# Altium PCB Shield.PcbDoc
Units mil, origin at the board's own origin, x right, y up, seen from the top; angles counter-clockwise.
Board outline 2100 x 2750 mil, 2 copper layers (Top Layer, Bottom Layer); 17 components, 30 nets, 92 pads, 8 vias.
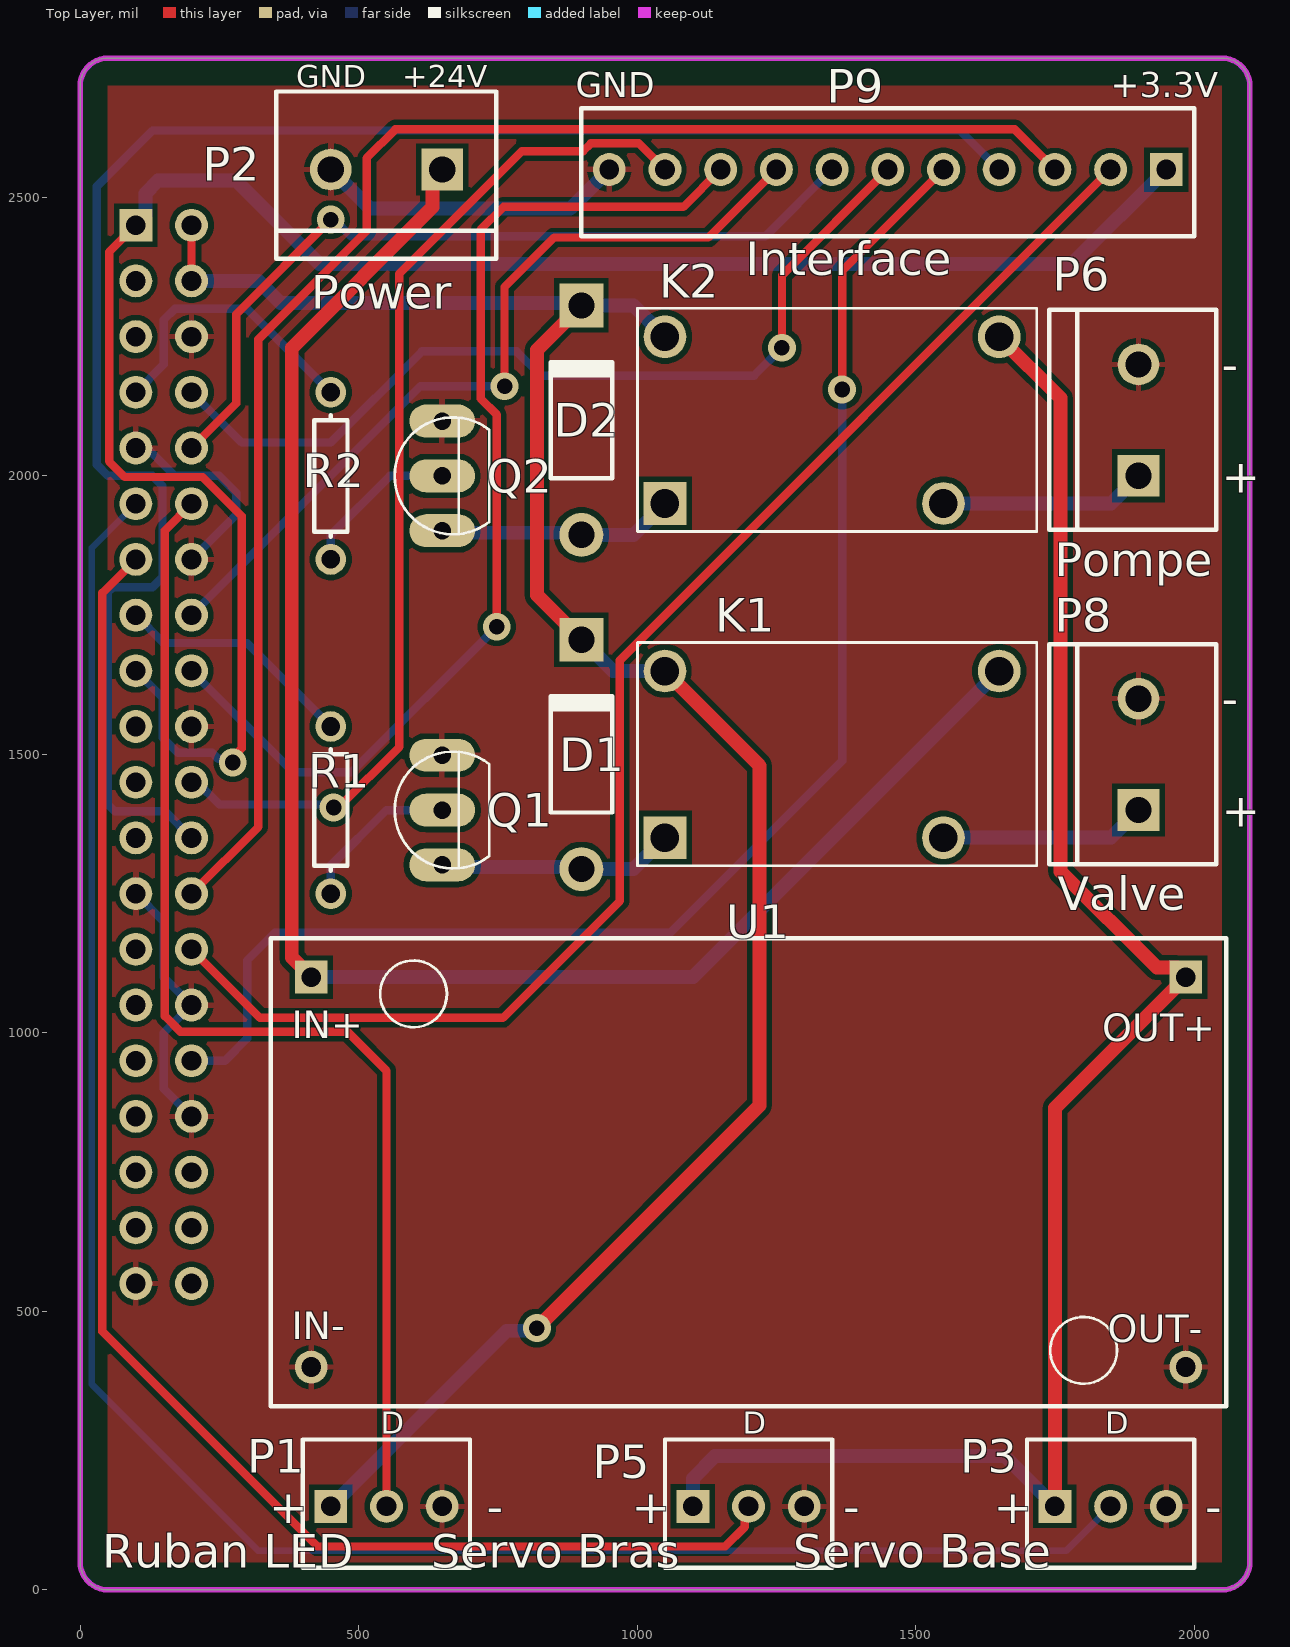
[diagram p0: Top Layer view]
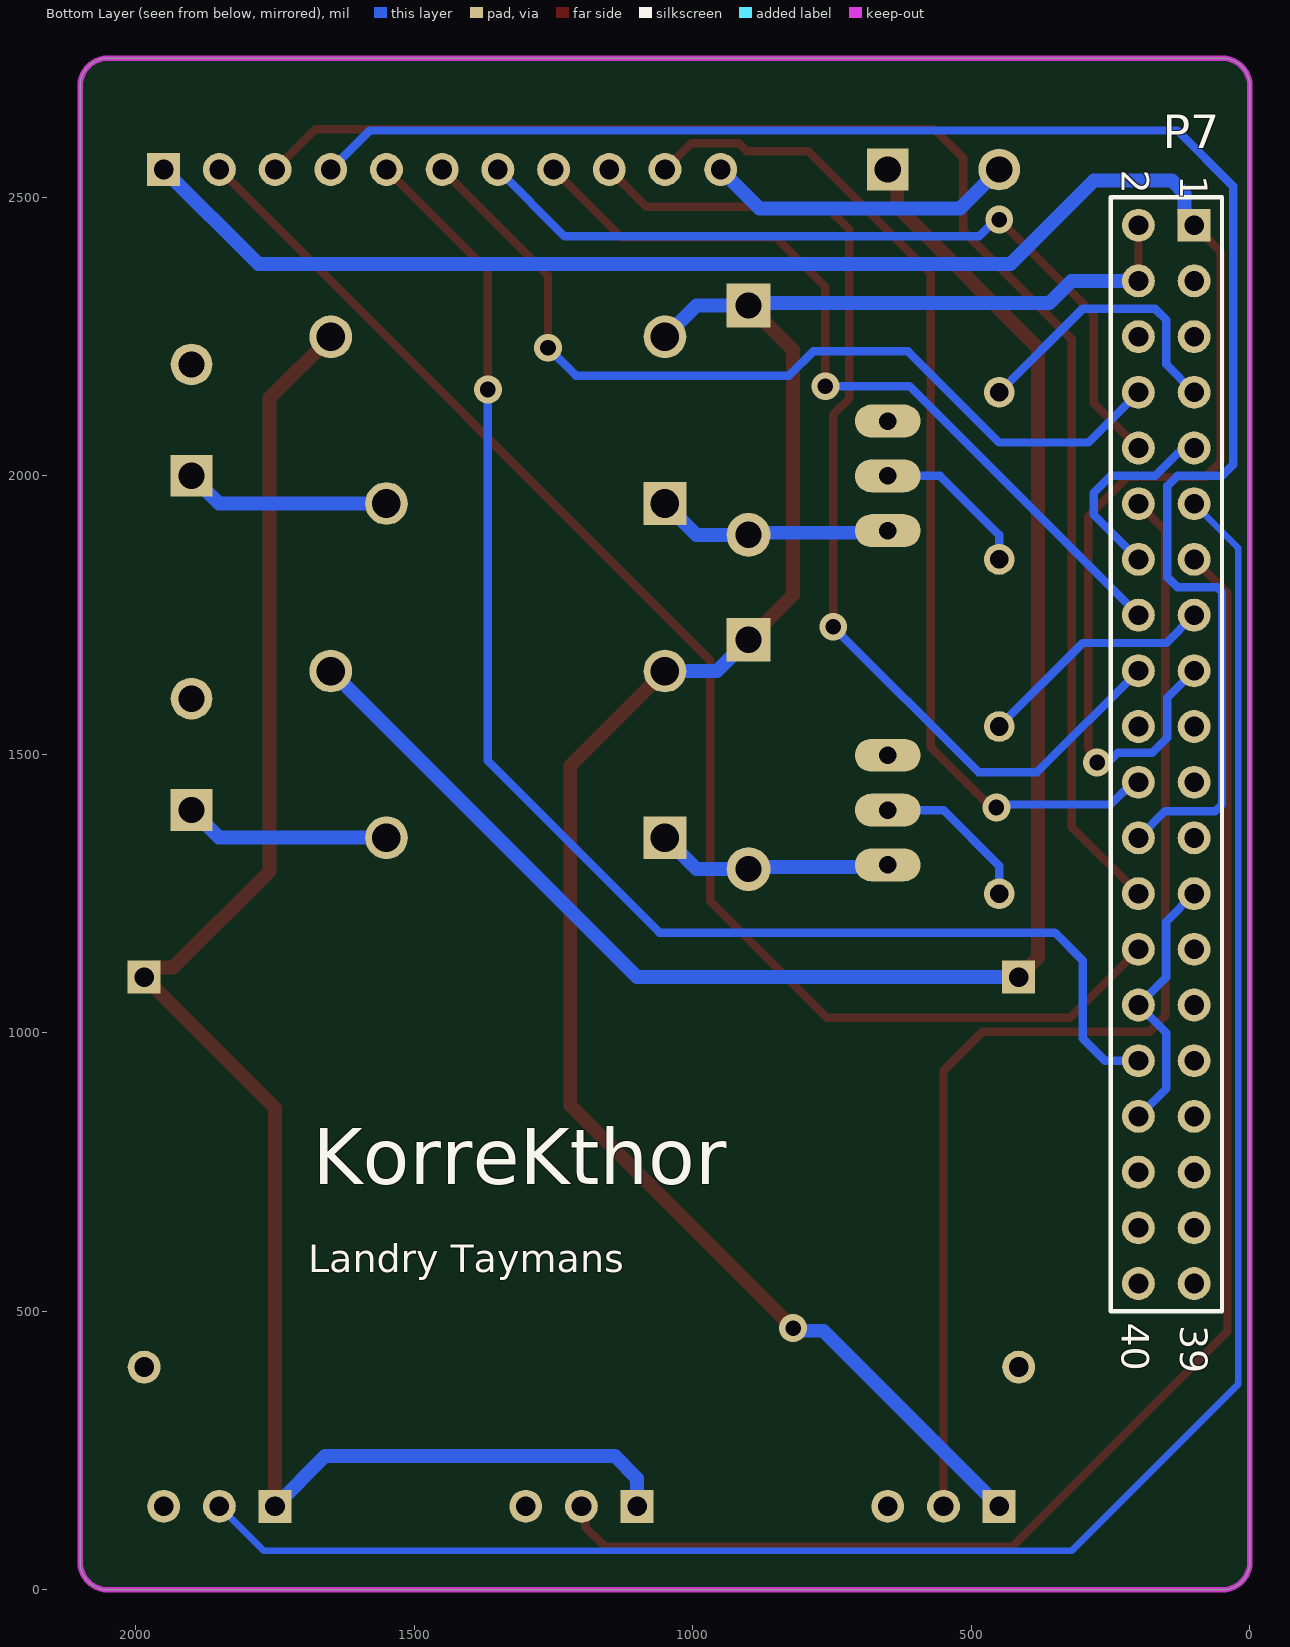
[diagram p1: Bottom Layer view, seen from below]

## Layer stack, top to bottom
Top Solder: solder mask 0.4, Solder Resist, Dk 3.5
Top Layer: signal copper 1.4
Dielectric 1: dielectric 12.6, FR-4, Dk 4.8
Bottom Layer: signal copper 1.4
Bottom Solder: solder mask 0.4, Solder Resist, Dk 3.5

## Board outline
0,50 ccw(c50,50) 50,0 2050,0 ccw(c2050,50) 2100,50 2100,2700 ccw(c2050,2700) 2050,2750 50,2750 ccw(c50,2700) 0,2700

## Design rules (kind name [scope] priority, off if disabled: settings)
Clearance [All] p1: gap=10 ignorepadtopadclearanceinfootprint=FALSE except(0: Arc-Hole Track-Hole SMDPad-Hole THPad-Hole Via-Hole Fill-Hole Poly-Hole Region-Hole Text-Hole)
PolygonConnect [All] p1: connectstyle=Relief reliefconductorwidth=10 reliefentries=4 polygonreliefangle="90 Angle" airgapwidth=10
RoutingVias [All] p1: holewidth=28 width=50 viastyle="Through Hole" minholewidth=28 minwidth=50 maxholewidth=28 maxwidth=50
SolderMaskExpansion [All] p1: expansion=4 istentingtop=FALSE
Width [All] p1: maxlimit=75 minlimit=10 preferedwidth=15
30 further rules are at their usual default settings.

## Components (designator, comment, footprint, x,y, rotation, side; value= is the part's Value field where it differs from the comment)
D1 "1N4004" DO-41 900,1500 r90 top
D2 "1N4004" DO-41 900,2100 r90 top
K1 "Relay-SPST" RELAY_OJE-SH_series 1350,1500 r0 top
K2 "Relay-SPST" RELAY_OJE-SH_series 1350,2100 r0 top
P1 "Ruban LED" Conn_1X3 450,150 r0 top
P2 "Power" Bornier_1X2 550,2550 r180 top
P3 "Servo Base" Conn_1X3 1750,150 r0 top
P5 "Servo Bras" Conn_1X3 1100,150 r0 top
P6 "Pompe" Bornier_1X2 1900,2100 r90 top
P7 "Rasberry Pi Connector" HDR2X20 200,2450 r270 bottom
P8 "Valve" Bornier_1X2 1900,1500 r90 top
P9 "Interface" Conn_1X11 1950,2550 r180 top
Q1 "2N2222" TO-92 650,1400 r90 top
Q2 "2N2222" TO-92 650,2000 r90 top
R1 "Res1" AXIAL-0.3 450,1400 r270 top value=3.9K
R2 "Res1" AXIAL-0.3 450,2000 r270 top value=3.9K
U1 "HW-411_Buck_converter" HW-411_Buck_converter 1200,750 r0 top

## Footprints (in the part's own frame and the unit in brackets; to place one, negate y for a bottom-side part, rotate by r counter-clockwise, add the part's x,y. Pads: shape width x height; smd on the part's side, far side on the other; paste and mask are expansions set on the pad)
AXIAL-0.3 [mm] "Axial Device, Thru-Hole; 2 Leads; 0.3 in Pin Spacing"
  round 1.4 hole 0.85: 1(-3.81,0) 2(3.81,0)
  silkscreen extent -2.77,-0.76 2.77,0.76
Bornier_1X2 [mm] "Connector; Header; 3 Position"
  rect 1.9x1.9 hole 1.2: 1(-2.54,0)
  round 1.9 hole 1.2: 2(2.54,0)
  silkscreen extent -5,-3.56 5.03,4.06
Conn_1X3 [mm] "Connector; Header; 3 Position"
  rect 1.5x1.5 hole 0.9: 1(0,0)
  round 1.5 hole 0.9: 2(2.54,0) 3(5.08,0)
  silkscreen extent -1.27,-2.79 6.35,3.05
Conn_1X11 [mm] "Connector; Header; 3 Position"
  rect 1.5x1.5 hole 0.9: 1(0,0)
  round 1.5 hole 0.9: 2(2.54,0) 3(5.08,0) 4(7.62,0) 5(10.16,0) 6(12.7,0) 7(15.24,0) 8(17.78,0) 9(20.32,0) 10(22.86,0) 11(25.4,0)
  silkscreen extent -1.27,-2.79 26.67,3.05
DO-41 [mm] "Diode, Axial; Body 5.2 x 2.7 mm (LxDia. max), Lead Dia. 0.86 mm (max)"
  round 2 hole 1.2: 1(-5.23,0)
  rect 2x2 hole 1.2: 2(5.23,0)
  silkscreen extent -2.65,-1.4 2.75,1.4
HDR2X20 [mm] "Connector; Header; 20x2 Position"
  rect 1.5x1.5 hole 0.9: 1(0,2.54)
  round 1.5 hole 0.9: 2(0,0) 3(2.54,2.54) 4(2.54,0) 5(5.08,2.54) 6(5.08,0) 7(7.62,2.54) 8(7.62,0) 9(10.16,2.54) 10(10.16,0) 11(12.7,2.54) 12(12.7,0) 13(15.24,2.54) 14(15.24,0) 15(17.78,2.54) 16(17.78,0) 17(20.32,2.54) 18(20.32,0) 19(22.86,2.54) 20(22.86,0) 21(25.4,2.54) 22(25.4,0) 23(27.94,2.54) 24(27.94,0) 25(30.48,2.54) 26(30.48,0) 27(33.02,2.54) 28(33.02,0) 29(35.56,2.54) 30(35.56,0) 31(38.1,2.54) 32(38.1,0) 33(40.64,2.54) 34(40.64,0) 35(43.18,2.54) 36(43.18,0) 37(45.72,2.54) 38(45.72,0) 39(48.26,2.54) 40(48.26,0)
  silkscreen extent -1.27,-1.27 49.53,3.81
HW-411_Buck_converter [mm] "HW-411 Buck converter Board"
  rect 1.5x1.5 hole 0.9: 1(-19.939,8.89) 3(19.939,8.89)
  round 1.5 hole 0.9: 2(-19.939,-8.89) 4(19.939,-8.89)
  silkscreen extent -21.78,-10.67 21.78,10.67
RELAY_OJE-SH_series [mm] "Relay_SPST"
  round 1.95 hole 1.3: 1(7.62,3.8) 2(5.08,-3.8) 3(-7.62,3.8)
  rect 1.95x1.95 hole 1.3: 4(-7.62,-3.8)
  silkscreen extent -8.87,-5.08 9.33,5.1
TO-92 [mm]
  oval 1.5x3 hole 0.8: 1(-2.5,0) 2(0,0) 3(2.5,0)
  silkscreen extent -2.67,-2.15 2.66,2.17

## Part data
D1 D2: library part "Diode 1N4004", "1 Amp General Purpose Rectifier", Code_JEDEC=DO-204-AL, ComponentLink1Description="Manufacturer Link", ComponentLink1URL=http://www.fairchildsemi.com/, ComponentLink2Description=Datasheet, ComponentLink2URL=http://www.fairchildsemi.com/ds/1N%2F1N4001.pdf, DatasheetVersion=1998, LatestRevisionDate=17-Jul-2002, LatestRevisionNote="Re-released for DXP Platform.", PackageDescription="Diode, Axial; Body 5.2 x 2.7 mm (LxDia. max), Lead Dia. 0.86 mm (max)", PackageReference=DO-41, PackageVersion=Aug-1999, Published=8-Jun-2000, Publisher="Altium Limited"
K1 K2: "Single-Pole Single-Throw Relay", LatestRevisionDate=17-Jul-2002, LatestRevisionNote="Re-released for DXP Platform.", PackageReference=MODULE4, Published=24-Mar-1999, Publisher="Altium Limited"
P1 P3 P5: library part "Header 3", "Header, 3-Pin", LatestRevisionDate=17-Jul-2002, LatestRevisionNote="Re-released for DXP Platform.", Publisher="Altium Limited"
P2 P6 P8: library part "Header 2", "Header, 2-Pin", LatestRevisionDate=17-Jul-2002, LatestRevisionNote="Re-released for DXP Platform.", Publisher="Altium Limited"
P7: library part MHDR2X20, "Header, 20-Pin, Dual row", LatestRevisionDate=17-Jul-2002, LatestRevisionNote="Re-released for DXP Platform.", Publisher="Altium Limited"
P9: library part "Header 11", "Header, 11-Pin", LatestRevisionDate=17-Jul-2002, LatestRevisionNote="Re-released for DXP Platform.", Publisher="Altium Limited"
Q1 Q2: library part NPN, "NPN Bipolar Transistor", Code_JEDEC=TO-226-AA, LatestRevisionDate=17-Jul-2002, LatestRevisionNote="Re-released for DXP Platform.", PackageDescription="TO, Flat Index; 3 In-Line, Axial Leads; Body Dia. 4.8mm; Leads 0.55 x 0.51 mm (max)", PackageReference=TO-226-AA, Published=8-Jun-2000, Publisher="Altium Limited"
R1 R2: "Resistor", LatestRevisionDate=17-Jul-2002, LatestRevisionNote="Re-released for DXP Platform.", PackageDescription="Axial Device, Thru-Hole; 2 Leads; 0.3 in Pin Spacing", PackageReference=AXIAL-0.3, Published=8-Jun-2000, Publisher="Altium Limited"
U1: "Buck converter board"

## Via types
v1: diameter 50, hole 28, Top Layer to Bottom Layer, 8 vias

## Nets (pads, with @x,y where several pads share a name; then routed paths per layer and width w, separated by ;. In a path a pad name is that pad's centre, name@x,y a point inside that pad or via, vN(x,y) a via of type N, cw(c..) or ccw(c..) an arc to the next point about the centre after c; other vN are vias at no path point)
+3.3: P7.1 P7.17 P9.1 | length 3495.3
  Top Layer w15: P7.1 52,2402 52,2026 80,1998 220,1998 290,1928 290,1510.67 274.15,1494.82 v1(274.15,1485.35)
  Bottom Layer w15: P7.17 148,1602 148,1530 175.03,1502.97 237.03,1502.97 247.95,1492.05 267.45,1492.05 v1(274.15,1485.35)
  Bottom Layer w25: P7.1 117.03,2467.03 117.03,2507.03 140,2530 280,2530 430,2380 1780,2380 P9.1
+5: D1.2 D2.2 K1.3 K2.3 P1.1 P7.2 P7.4 | length 3749.4
  Top Layer w15: P7.4 P7.2
  Top Layer w25: v1(820,470) 1220,870 1220,1479.61 K1.3 ; D1.2 820,1785.91 820,2225.91 D2.2
  Bottom Layer w25: P7.4 320,2350 360,2310 895.91,2310 D2.2 993.7,2305.91 K2.3 ; P1.1 765.22,465.22 815.22,465.22 v1(820,470) ; D1.2 956.3,1649.61 K1.3
+24: K1.1 P2.1 U1.1 | length 3039
  Top Layer w25: U1.1 380,1135 380,2230 632.97,2482.97 632.97,2532.97 P2.1
  Bottom Layer w25: U1.1 1100.39,1100 K1.1
GND: P1.3 P2.2 P3.3 P5.3 P6.2 P7.6 P7.9 P7.14 P7.20 P7.25 P7.30 P7.34 P7.39 P8.2 P9.11 Q1.3 Q2.3 U1.2 U1.4 | length 1407.1
  Bottom Layer w15: P7.25 150,1200 150,1100 P7.30 150,1000 150,900 P7.34 ; P7.9 108.43,2041.57 128.43,2041.57 170,2000 250,2000 280,1970 280,1930 P7.14
  Bottom Layer w25: P2.2 520,2480 880,2480 P9.11
GPIO1: P7.28 P9.2 | length 2584.9
  Top Layer w15: P7.28 323,1027 759,1027 969,1237 969,1669 P9.2
GPIO4: P7.7 R2.1 | length 521.1
  Bottom Layer w15: P7.7 150,2200 150,2280 170,2300 300,2300 R2.1
GPIO7: P7.26 P9.3 | length 2737.4
  Top Layer w15: P7.26 320,1370 320,2245.28 514.5,2439.78 514.5,2570.5 566.03,2622.03 1677.97,2622.03 P9.3
GPIO8: P7.24 P9.4 | length 3153.3
  Bottom Layer w15: P7.24 152,1398 62,1398 50,1410 50,1791.21 58.79,1800 130,1800 148,1818 148,1982 130,2000 50,2000 30,2020 30,2520 130,2620 1580,2620 P9.4
GPIO12: P7.32 P9.5 | length 2610.2
  Top Layer w15: v1(1368,2155) 1368,2368 P9.5
  Bottom Layer w15: P7.32 260,950 300,990 300,1130 350,1180 1060,1180 1368,1488 v1(1368,2155)
GPIO14: P7.8 P9.6 | length 1602.4
  Top Layer w15: v1(1260,2230) 1260,2360 P9.6
  Bottom Layer w15: P7.8 290,2060 450,2060 613.5,2223.5 783.76,2223.5 827.26,2180 1210,2180 v1(1260,2230)
GPIO15: P7.10 P9.7 | length 1475.7
  Top Layer w15: P7.10 280,2130 280,2290 v1(450,2460)
  Bottom Layer w15: v1(450,2460) 456.29,2460 486.29,2430 1230,2430 P9.7
GPIO17: P3.2 P7.11 | length 3599.7
  Bottom Layer w12: P7.11 21,1871 21,369 320,70 1770,70 P3.2
GPIO18: P1.2 P7.12 | length 2160.5
  Top Layer w15: P7.12 152,1902 152,1030 180,1002 480,1002 550,932 P1.2
GPIO22: P7.15 R1.1 | length 432.8
  Bottom Layer w15: P7.15 150,1700 300,1700 R1.1
GPIO23: P7.16 P9.8 | length 1485.6
  Top Layer w15: v1(762,2161) 762,2339 851,2428 1128,2428 P9.8
  Bottom Layer w15: P7.16 611,2161 v1(762,2161)
GPIO24: P7.18 P9.9 | length 1932.2
  Top Layer w15: v1(748,1729) 748,2110 719,2139 719,2442 760,2483 1083,2483 P9.9
  Bottom Layer w15: P7.18 382,1468 487,1468 v1(748,1729)
GPIO25: P7.22 P9.10 | length 1879.9
  Top Layer w15: v1(455,1404.61) 464.22,1404.61 573,1513.39 573,2363 793,2583 903,2583 917.03,2597.03 1002.97,2597.03 P9.10
  Bottom Layer w15: P7.22 210,1450 250,1410 449.61,1410 v1(455,1404.61)
GPIO27: P5.2 P7.13 | length 2778.2
  Top Layer w15: P7.13 40,1790 40,464 426.03,77.97 1157.97,77.97 1193.21,113.21 1193.21,143.21 P5.2
NetD1_1: D1.1 K1.4 Q1.1 | length 426.4
  Bottom Layer w25: Q1.1 653.74,1297.83 896.26,1297.83 D1.1 993.7,1294.09 K1.4
NetD2_1: D2.1 K2.4 Q2.1 | length 426.4
  Bottom Layer w25: Q2.1 653.74,1897.83 896.26,1897.83 D2.1 993.7,1894.09 K2.4
NetD3_1: 
NetD4_1: 
NetD5_1: 
NetD5_3: 
NetD5_4: 
NetQ1_2: Q1.2 R1.2 | length 291.4
  Bottom Layer w15: R1.2 450,1300 550,1400 Q1.2
NetQ2_2: Q2.2 R2.2 | length 287.9
  Bottom Layer w15: R2.2 450,1894 556,2000 Q2.2
Pompe: K2.2 P6.1 | length 370.5
  Bottom Layer w25: K2.2 1850.39,1950.39 P6.1
Valve: K1.2 P8.1 | length 370.5
  Bottom Layer w25: K1.2 1850.39,1350.39 P8.1
VCC: K2.1 P3.1 P5.1 U1.3 | length 3110.1
  Top Layer w25: K2.1 1760,2139.61 1760,1290 1932.97,1117.03 1967.97,1117.03 U1.3 1750,865 P3.1
  Bottom Layer w25: P5.1 1100,200 1140,240 1660,240 P3.1
pads on no net: P7.3 P7.5 P7.19 P7.21 P7.23 P7.27 P7.29 P7.31 P7.33 P7.35 P7.36 P7.37 P7.38 P7.40

## Polygon pours and split planes (outlines as drawn)
GND on Top Layer "GND_Plane" (solid, pour order 2): 50,2700 2050,2700 2050,50 50,50

## Keep-outs
Keep-Out Layer:
  the board outline again, w10

## Silkscreen, mask and mechanical layers (free items; w line width, h text height)
Top Overlay:
  text "GND" at 388,2698 h40
  text "+24V" at 578,2698 h40
  text "GND" at 890,2680 h45
  text "+3.3V" at 1850,2680 h45
  text "-" at 2050,2170.01 h60
  text "+" at 2050,1970 h60
  text "-" at 2050,1570.01 h60
  text "+" at 2050,1370 h60
  text "D" at 540,280 h40
  text "D" at 1190,280 h40
  text "D" at 1840,280 h40
  text "+" at 340,120 h60
  text "-" at 730,120.01 h60
  text "+" at 990,120 h60
  text "-" at 1370,120.01 h60
  text "+" at 1640,120 h60
  text "-" at 2020,120.01 h60
Bottom Overlay:
  text "KorreKthor" at 1682,728 h100
  text "Landry Taymans" at 1690,570 h50

## Dimensions
2040,1903 to 2040,1698 on Top Paste
2000,2430 to 2040,2298 on Top Paste
353.3,2390 to 353,2690 on Top Paste
2000,2660 to 2000,2430 on Top Paste
2000,2830 to 2100,2700 on Top Paste
900,2660 to 2000,2660 on Top Paste
747,2690 to 900,2660 on Top Paste
353,2690 to 747,2690 on Top Paste
0,2700 to 350,2730 on Top Paste
2000,40 to 2050,0 on Top Paste
2000,40 to 2000,270 on Top Paste
2000,40 to 2100,50 on Top Paste
1350,40 to 1700,40 on Top Paste
700,26.06 to 1050,40 on Top Paste
400,40 to 700,40 on Top Paste
0,0 to 400,40 on Top Paste
2050,0 to 2050,2750 on Top Paste
2100,50 to 0,50 on Top Paste

## Text inside footprints (layer, text, board x,y; h text height)
P7: Bottom Overlay "1" at 125,2540 h50 r90; Bottom Overlay "39" at 125,475 h50 r90; Bottom Overlay "40" at 230,480 h50 r90; Bottom Overlay "2" at 230,2550 h50 r90
U1: Top Overlay "IN+" at 380,990 h50; Top Overlay "IN-" at 380,450 h50; Top Overlay "OUT-" at 1845,445 h50; Top Overlay "OUT+" at 1835,985 h50